# Altium PCB Bop_it PCB.PcbDoc
Units mil, origin at the board's own origin, x right, y up, seen from the top; angles counter-clockwise.
Board outline 2785 x 2940 mil, 2 copper layers (Top Layer, Bottom Layer); 23 components, 19 nets, 87 pads, 2 vias.
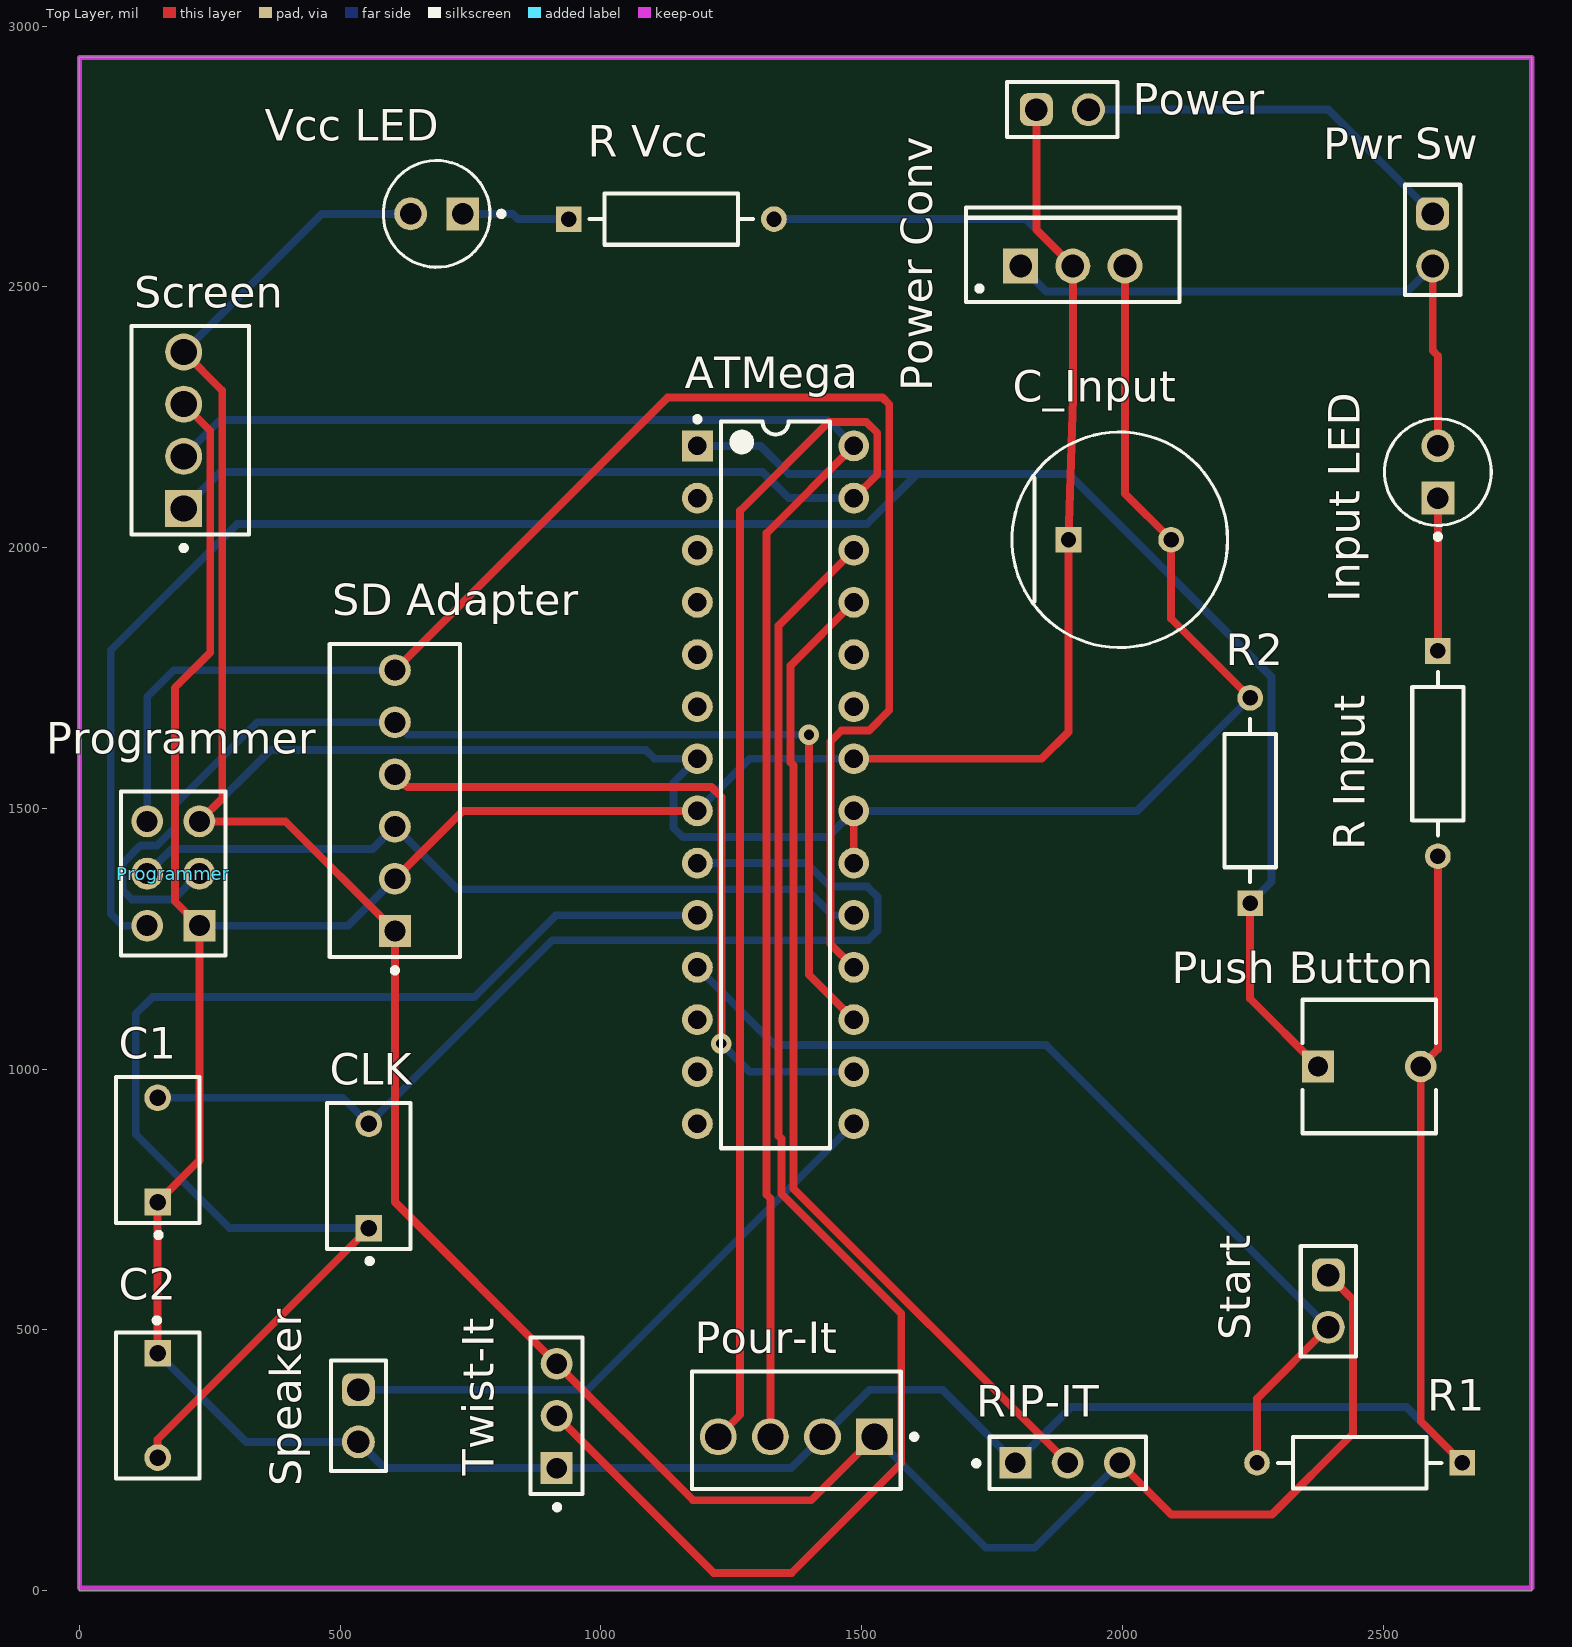
[diagram p0: Top Layer view]
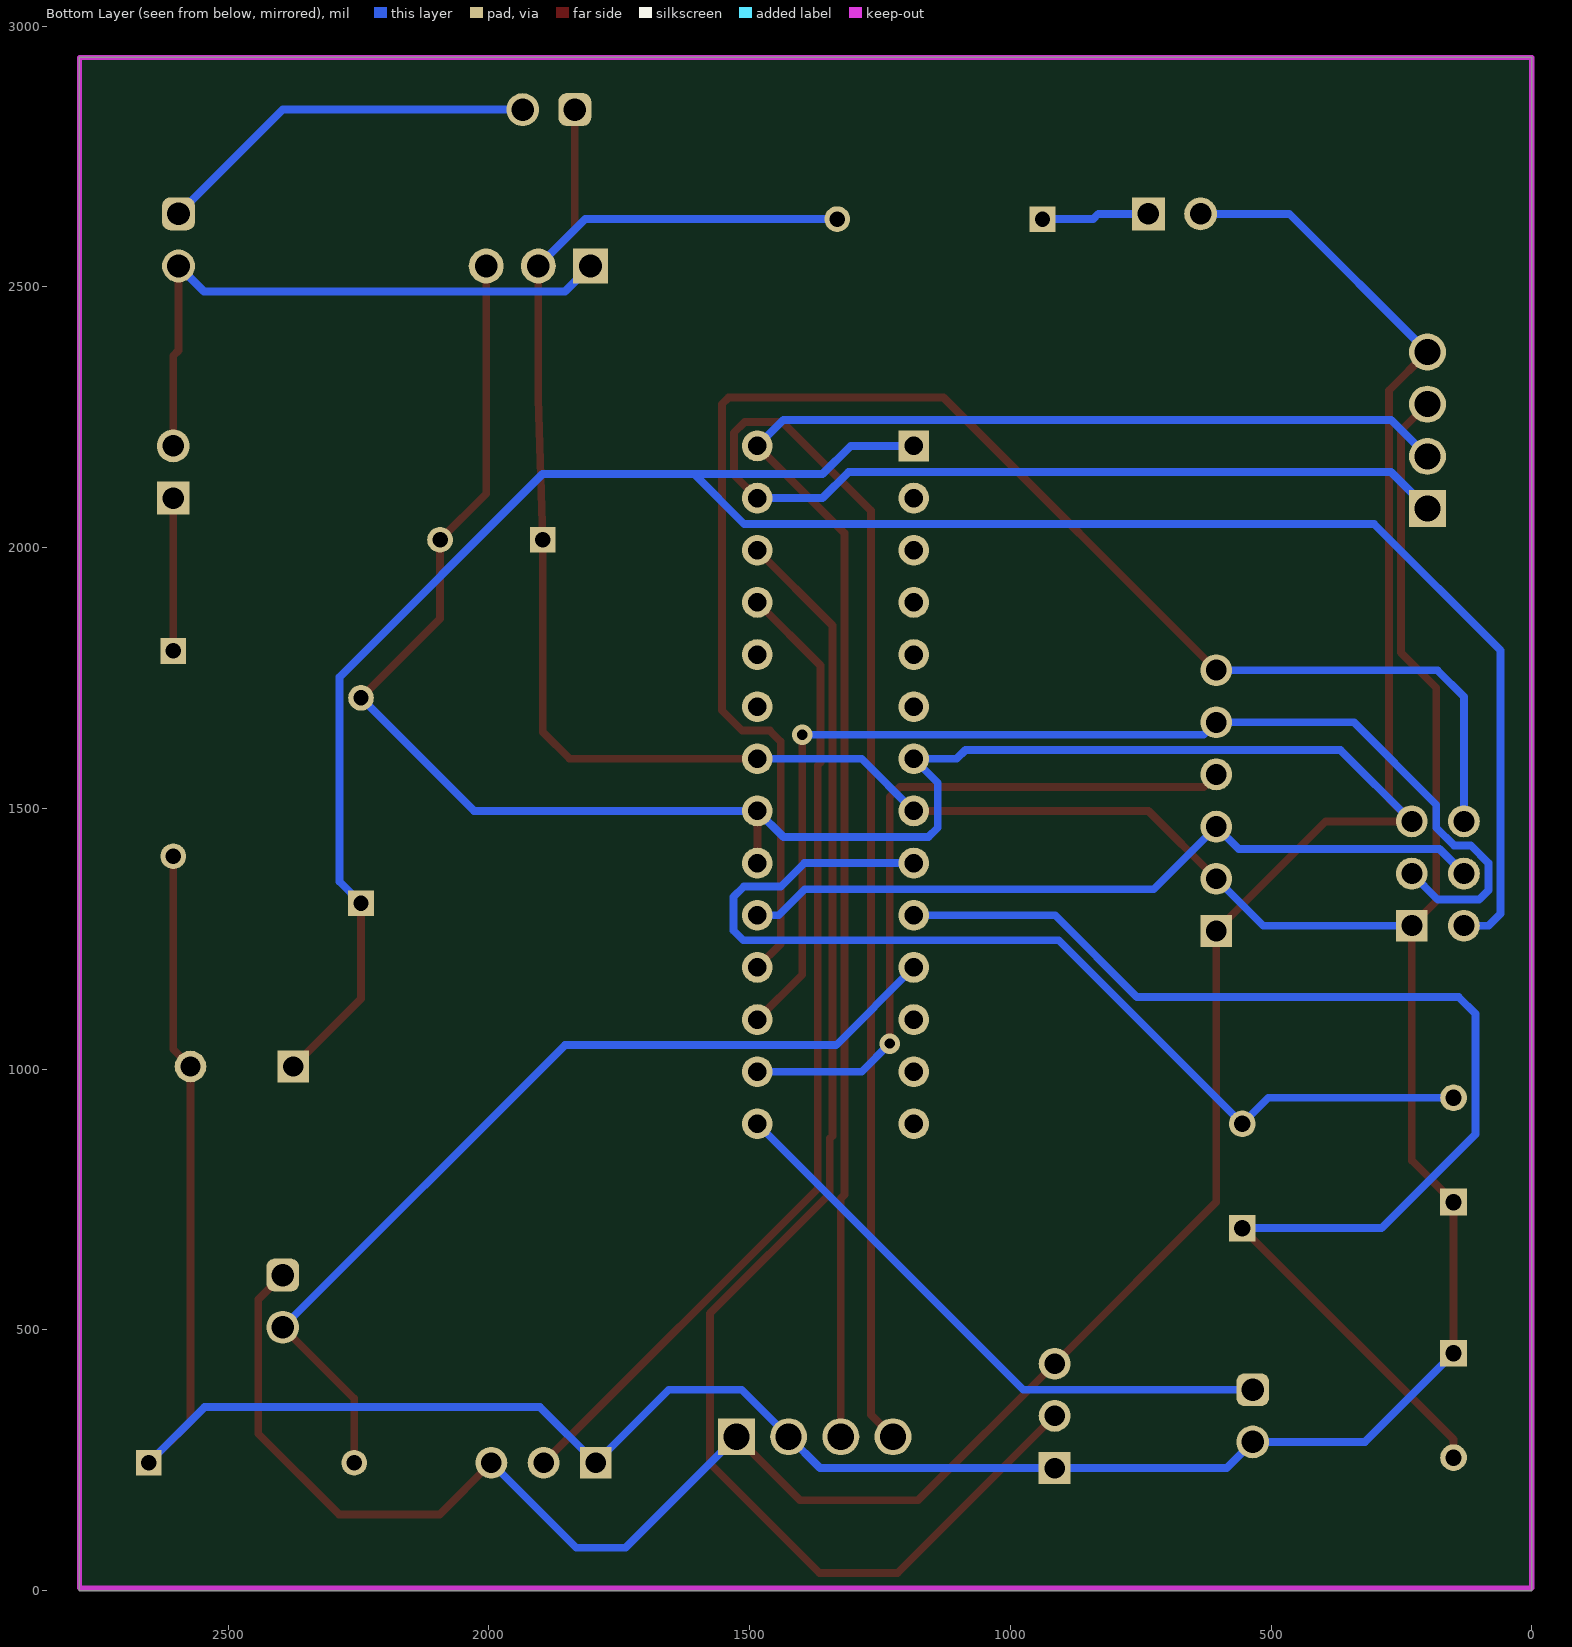
[diagram p1: Bottom Layer view, seen from below]
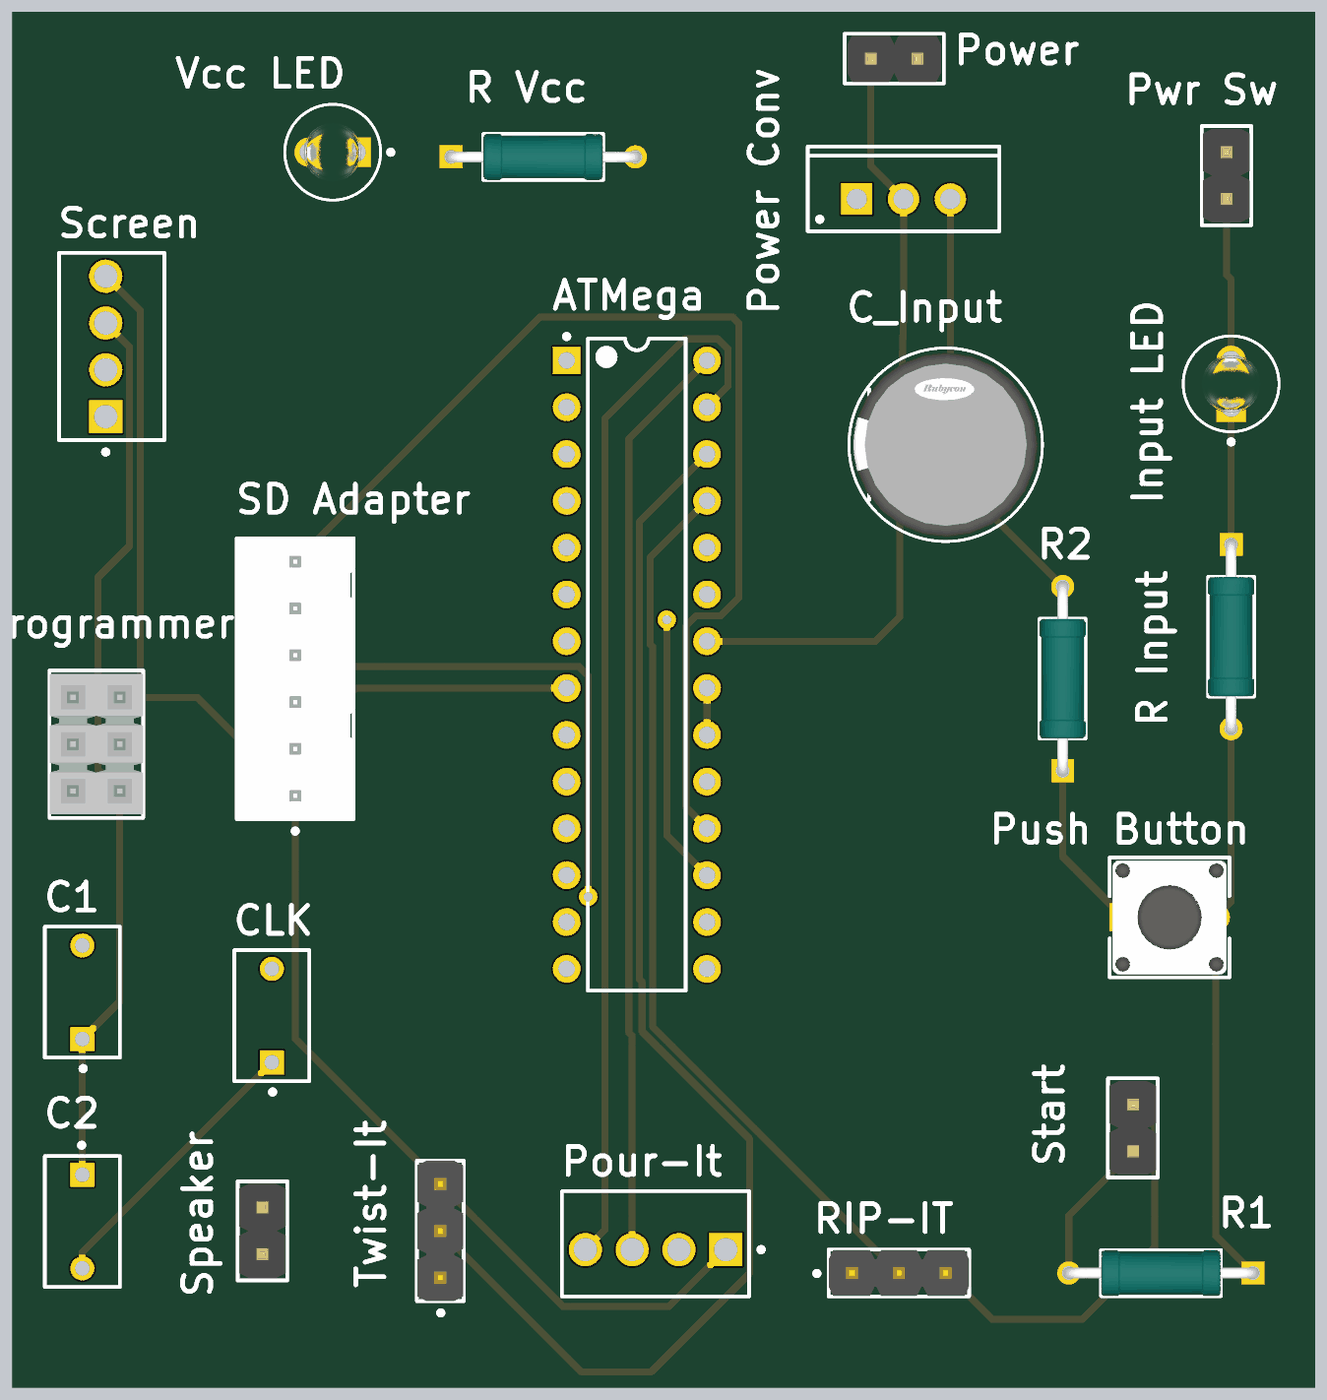
[diagram p2: 3D render of the assembled board from above, using the file's embedded part models]

## Layer stack, top to bottom
Top Solder: solder mask 0.4, Solder Resist, Dk 3.5
Top Layer: signal copper 1.4
Dielectric 1: dielectric 12.6, FR-4, Dk 4.8
Bottom Layer: signal copper 1.4
Bottom Solder: solder mask 0.4, Solder Resist, Dk 3.5

## Board outline
0,0 2785,0 2785,2940 0,2940

## Design rules (kind name [scope] priority, off if disabled: settings)
BoardOutlineClearance [All] p1: gap=7.87 ignorepadtopadclearanceinfootprint=FALSE except(15.75: Arc-SplitBarrior Arc-SplitContinuation Track-SplitBarrior Track-SplitContinuation SMDPad-SplitBarrior SMDPad-SplitContinuation THPad-SplitBarrior THPad-SplitContinuation Via-SplitBarrior Via-SplitContinuation Fill-SplitBarrior Fill-SplitContinuation Poly-SplitBarrior Poly-SplitContinuation Region-SplitBarrior Region-SplitContinuation Text-SplitBarrior Text-SplitContinuation)
Clearance "Clearance Bottom Layer" [OnLayer('Bottom Layer')] p1: gap=8 ignorepadtopadclearanceinfootprint=TRUE except(10: Arc-Text Track-Text SMDPad-Text THPad-Text Via-Text Fill-Text Poly-Text Region-Text Text-Text)
Clearance "Clearance Top Layer" [OnLayer('Top Layer')] p2: gap=8 ignorepadtopadclearanceinfootprint=TRUE except(10: Arc-Text Track-Text SMDPad-Text THPad-Text Via-Text Fill-Text Poly-Text Region-Text Text-Text)
Clearance [All] p3: gap=7.87 ignorepadtopadclearanceinfootprint=FALSE except(3.5: Arc-Arc Arc-Track Arc-SMDPad Track-Track Track-SMDPad SMDPad-SMDPad; 5: Arc-Via Track-Via SMDPad-Via THPad-Via Via-Via; 10: Arc-Text Track-Text SMDPad-Text THPad-Text Via-Text Fill-Text Poly-Text Region-Text Text-Text)
HoleSize [All] p1: absolutevalues=TRUE maxlimit=248.03 minlimit=7.87 maxpercent=80.000 minpercent=20.000
MinimumAnnularRing [All] p1: minimumring=3
MinimumSolderMaskSliver [All] p1: minsoldermaskwidth=3.94
PolygonConnect PolygonConnect_1 [All] p1: thpad.connectstyle=Relief thpad.reliefconductorwidth=20 thpad.reliefentries=4 thpad.polygonreliefangle="90 Angle" thpad.airgapwidth=10 smdpad.connectstyle=Relief smdpad.reliefconductorwidth=20 smdpad.reliefentries=4 smdpad.polygonreliefangle="90 Angle" smdpad.airgapwidth=10 via.connectstyle=Direct via.reliefconductorwidth=20 via.reliefentries=4 via.polygonreliefangle="90 Angle" via.airgapwidth=10
RoutingCorners [All] p1: cornerstyle=Round minsetback=100 maxsetback=100
RoutingVias [All] p1: holewidth=19.68 width=39.37 viastyle="Through Hole" minholewidth=7.87 minwidth=17.72 maxholewidth=39.37 maxwidth=78.74
SilkToSilkClearance [All] p1: silktosilkclearance=3.94
SilkToSolderMaskClearance [IsPad] p1: minsilkscreentomaskgap=3.94 clearancetoexposedcopper=TRUE
SolderMaskExpansion [All] p1: expansion=4 istentingtop=FALSE
Width [All] p1: maxlimit=100 minlimit=3.5 preferedwidth=15
25 further rules are at their usual default settings.

## Components (designator, comment, footprint, x,y, rotation, side; value= is the part's Value field where it differs from the comment)
ATMega "ATmega328-PU" 28P3 1335,1545 r0 top
C1 "C330C105M5U5TA" KEMT-C330C105M5U5TA 150,845 r90 top
C2 "C330C105M5U5TA" KEMT-C330C105M5U5TA 150,355 r270 top
C_Input "25ZL680MEFC10X20" FP-ZL10X20-MFG 1995,2015 r0 top
CLK "C330C105M5U5TA" KEMT-C330C105M5U5TA 555,795 r90 top (schematic designator "Crystall Oscillator")
"Input LED" "" FP-6_544-5255_01-4-MFG 2605,2145 r90 top
Pour-It "IMU" TECO-640456-4 1375,295 r0 top
Power "61300211121" 61300211121 1885,2840 r0 top (schematic designator "Input Power")
"Power Conv" "L7805CV" TO220 1905,2540 r0 top
Programmer "TSW-103-08-G-D" SMTC-TSW-103-08-X-D 230,1275 r90 top
"Push Button" "RESET" FP-FSM4JRT-MFG 2473.5,1005 r0 top
"Pwr Sw" "61300211121" 61300211121 2595,2590 r270 top (schematic designator "Power Switch")
R1 "" FP-MRS25-MFG 2455,245 r180 top
R2 "MRS25000C1000FRP00" FP-MRS25-MFG 2245,1515 r90 top
"R Input" "MRS25000C1000FRP00" FP-MRS25-MFG 2605,1605 r270 top
"R Vcc" "MRS25000C1000FRP00" FP-MRS25-MFG 1135,2630 r0 top
RIP-IT "Slide Pot" FP-90120-0763-MFG 1895,245 r0 top
Screen "640456-4" TECO-640456-4 200,2225 r270 top
"SD Adapter" "22-23-2061" MOLX-22-23-2061_V 605,1515 r90 top
Speaker "61300211121" 61300211121 535,335 r270 top
Start "61300211121" 61300211121 2395,555 r270 top (schematic designator "Start Button")
Twist-It "Rot Pot" FP-90120-0763-MFG 915,335 r90 top
"Vcc LED" "TLLG4401" FP-6_544-5255_01-4-MFG 685,2640 r180 top

## Footprints (in the part's own frame and the unit in brackets; to place one, negate y for a bottom-side part, rotate by r counter-clockwise, add the part's x,y. Pads: shape width x height; smd on the part's side, far side on the other; paste and mask are expansions set on the pad)
28P3 [mm] "28-Pin Plastic Dual In-Line Package (PDIP)"
  rect 1.5x1.5 hole 0.9: 1(-3.81,16.51)
  round 1.5 hole 0.9: 2(-3.81,13.97) 3(-3.81,11.43) 4(-3.81,8.89) 5(-3.81,6.35) 6(-3.81,3.81) 7(-3.81,1.27) 8(-3.81,-1.27) 9(-3.81,-3.81) 10(-3.81,-6.35) 11(-3.81,-8.89) 12(-3.81,-11.43) 13(-3.81,-13.97) 14(-3.81,-16.51) 15(3.81,-16.51) 16(3.81,-13.97) 17(3.81,-11.43) 18(3.81,-8.89) 19(3.81,-6.35) 20(3.81,-3.81) 21(3.81,-1.27) 22(3.81,1.27) 23(3.81,3.81) 24(3.81,6.35) 25(3.81,8.89) 26(3.81,11.43) 27(3.81,13.97) 28(3.81,16.51)
  silkscreen extent -3.93,-17.7 2.65,17.93, body extent -3.6,-17.65 3.6,17.65, height 4.58
61300211121 [mm] "Pin Header, pitch 2.54 mm, THT, Vertical, single row, 2p"
  rrect50% 1.6x1.6 hole 1.1: 1(-1.27,0)
  round 1.6 hole 1.1: 2(1.27,0)
  silkscreen extent -2.69,-1.34 2.69,1.34, body extent -2.54,-1.27 2.54,1.27, height 8.57
FP-6_544-5255_01-4-MFG [mm]
  rect 1.6x1.6 hole 1.05 paste-1000 mask+0: 1(-1.27,0)
  round 1.6 hole 1.05 paste-1000 mask+0: 2(1.27,0)
  silkscreen extent -3.27,-2.6 2.6,2.6, body extent -2.32,-2.32 2.32,2.32, height 0.25
FP-90120-0763-MFG [mm]
  rect 1.55x1.55 hole 1 paste-1000 mask+0: 1(-2.54,0)
  round 1.55 hole 1 paste-1000 mask+0: 2(0,0) 3(2.54,0)
  silkscreen extent -4.57,-1.27 3.81,1.27, body extent -3.91,-1.37 3.91,1.37, height 0.25
FP-FSM4JRT-MFG [mil]
  rect 60.65x60.65 hole 39 paste-39370.1 mask+0: 1(-98.5,0)
  round 60.65 hole 39 paste-39370.1 mask+0: 2(98.5,0)
  silkscreen extent -128,-128 128,128, body extent -133,-132 133,132, height 10
FP-MRS25-MFG [mm]
  rect 1.25x1.25 hole 0.75 paste-1000 mask+0: 1(-5,0)
  round 1.25 hole 0.75 paste-1000 mask+0: 2(5,0)
  silkscreen extent -3.97,-1.25 3.97,1.25, body extent -5.72,-1.35 5.72,1.35, height 0.25
FP-ZL10X20-MFG [mm]
  rect 1.25x1.25 hole 0.75 paste-1000 mask+0: 1(-2.5,0)
  round 1.25 hole 0.75 paste-1000 mask+0: 2(2.5,0)
  silkscreen extent -5.25,-5.25 5.25,5.25, body extent -5.35,-5.35 5.35,5.35, height 0.25
KEMT-C330C105M5U5TA [mm] "THD, 2-Leads, Body 7.11x4.07mm"
  rect 1.3x1.3 hole 0.8: 1(-2.54,0)
  round 1.3 hole 0.8: 2(2.54,0)
  silkscreen extent -4.27,-2.03 3.55,2.03, body extent -3.55,-2.03 3.55,2.03, height 9.14
MOLX-22-23-2061_V [mm] "THD, 6-Leads, Body 15.24x6.35mm, Pitch 2.54mm"
  rect 1.55x1.55 hole 1.02: 1(-6.35,0)
  round 1.55 hole 1.02: 2(-3.81,0) 3(-1.27,0) 4(1.27,0) 5(3.81,0) 6(6.35,0)
  silkscreen extent -8.39,-3.18 7.62,3.18, body extent -7.54,-3.25 7.54,3.1, height 10.67
SMTC-TSW-103-08-X-D [mm] ".025 SQ Post Terminal Strip Assembly, 2x3 Pins, Vertical, 2.54mm Pitch, Male"
  rect 1.55x1.55 hole 1.02: 1(0,0)
  round 1.55 hole 1.02: 2(0,2.54) 3(2.54,0) 4(2.54,2.54) 5(5.08,0) 6(5.08,2.54)
  silkscreen extent -1.46,-1.27 6.54,3.81, body extent -1.27,-1.27 6.35,3.81, height 8.38
TECO-640456-4 [mm] "Through Hole, 4-Leads, Body 10.16x5.72mm, Pitch 2.54mm"
  rect 1.8x1.8 hole 1.27 paste+0: 1(3.81,0)
  round 1.8 hole 1.27 paste+0: 2(1.27,0) 3(-1.27,0) 4(-3.81,0)
  silkscreen extent -5.08,-2.54 5.86,3.18, body extent -5.08,-2.54 5.08,3.18, height 10.03
TO220 [mm] "TO, Thru-Hole, Vertical, Heatsink Mounted; 3 In-Line Leads; Pitch 2.54 mm"
  rect 1.7x1.7 hole 1.1: 1(-2.54,0)
  round 1.7 hole 1.1: 2(0,0) 3(2.54,0)
  silkscreen extent -5.2,-1.75 5.2,2.85, body extent -5.25,-1.8 5.25,2.9, height 19.7

## Part data
ATMega: library part CMP-0095-00015-2, "8-bit AVR Microcontroller, 32KB Flash, 1KB EEPROM, 2KB SRAM, 28-pin PDIP, Industrial Grade (-40°C to 85°C)", ComponentLink1Description="Manufacturer URL", ComponentLink1URL=http://www.atmel.com/, ComponentLink2Description="ATmega48A/48PA/88A/88PA/168A/168PA/328/328P Datasheet", ComponentLink2URL=http://www.atmel.com/dyn/resources/prod_documents/8271.pdf, ComponentLink3Description="ATmega48A/48PA/88A/88PA/168A/168PA/328/328P Summary", ComponentLink3URL=http://www.atmel.com/dyn/resources/prod_documents/8271S.pdf, DatasheetVersion="revD, May-2011", PackageDescription="28-lead (0.300\"/7.62mm Wide) Plastic Dual Inline Package (PDIP)", PackageReference=28P3, PackageVersion="revB, Sep-2001", RevisionNote="DatasheetVersion updated. URLs added."
C1 C2 CLK: library part CMP-2000-06056-1, "Ceramic Capacitor, 1 uF, +/- 20%, 50 V, -10 to 85 degC, 2-Pin THD, RoHS, Bulk", Capacitance=1µF, Manufacturer=Kemet, Operating Temperature=10°C~85°C, Package / Case=Radial, Package Description="2-Pin Through Hole Device, Body 7.11 x 4.07 mm", Ratings=-, Standard Package=250, Temperature Coefficient=Z5U, Tolerance=±20%, Voltage - Rated=50V, Applications=GeneralPurpose, Catalog Drawings=C330(std), Category=Capacitors, Datasheet URL=http://www.kemet.com/Lists/ProductCatalog/Attachments/599/KEM_C1051_GOLDMAX_Z5U.pdf, Datasheet Version=12/2015, Family=CeramicCapacitors, Features=-, Height - Seated (Max)="0.360\"(9.14mm)", Lead Spacing="0.200\"(5.08mm)", Lead Style=Straight, Manufacturer URL=http://www.kemet.com/, Mounting Technology=ThroughHole, Mounting Type=ThroughHole, Online Catalog=GoldenMax™Series, Other Names=399-4390, Package Reference=C330C105M5U5TA, Packaging=Bulk, PCN Design/Specification=C3yySeriesGoldenMaxLeadConfiguration02/Feb/2015, Product Training Modules=CapacitorBasics-TypicalUsesforCapacitors, Series=GoldenMax™, Size / Dimension="0.300\"Lx0.150\"W(7.62mmx3.81mm)", Thickness (Max)=-
C_Input: library part CMP-35376-000011-1, "CAP ALUM 680UF 20% 25V RADIAL", Capacitance=680uF, Case/Package=Radial, Dielectric Material=Aluminium, Leakage Current=3uA, Max Operating Temperature=105°C, Min Operating Temperature=-40°C, Package Quantity=1000, Ripple Current=1.82A, Tolerance=20%, Voltage=25V, Construction=RADIAL, Diameter=10mm, Height=20mm, Height - Seated (Max)=0.866inch, Impedance=23mR, Lead Diameter=0.6mm, Lead Pitch=5mm, Life (Hours)=4000Hour, Mount="Through Hole", Packaging=Bulk, Radiation Hardening=No, RoHS Compliant=Yes, Series=ZL, Termination=Radial, Voltage Rating=25V
"Input LED" "Vcc LED": library part CMP-00030-39390728-1, "TLLG4401 LED, Green, 2mcd, 3mmDia., T-1, +/-25deg, 565nm, 7mA, 1.9V Vf, 20V Vr, 20mW, -40", Ambient Temperature Range High=100°C, Case/Package=Radial, Color=Green, Forward Current=2mA, Forward Voltage=1.9V, Min Operating Temperature=-40°C, Power Dissipation=20mW, Reverse Voltage=6V, Voltage Rating (DC)=2.4V, Depth=3.2mm, Dominant Wavelength=575nm, Height=4.5mm, Illumination Color=Green, Lead Free="Lead Free", Lead Length=23mm, Length=3.2mm, Lens Color=Green, Lens Style="Circular, Colored, Diffused, Dome, Round, Tinted", Lens Transparency=Diffused, Luminous Intensity=2mcd, Max Junction Temperature (Tj)=100°C, Max Operating Temperature=100°C, Mount="Through Hole", NexarPartId=39390728, Number of Elements=1, Number of LEDs=1, Number of Pins=2, Packaging=Bulk, Peak Wavelength=565nm, Radiation Hardening=No, REACH SVHC=Unknown, RoHS=Compliant, Schedule B="8541402000, 8541402000", Test Current=2mA, Viewing Angle=25°, Wavelength=575nm
Pour-It Screen: library part CMP-2000-05419-1, "Male Header, Pitch 2.54 mm, 1 x 4 Position, Height 10.03 mm, Tail Length 3.56 mm, RoHS, Bulk", Color=White, Current, Rating="5 /  / A", Flammability Rating=UL94V-0, Manufacturer="TE Connectivity", Temperature, Operating="-55to+105 /  / degC", Voltage, Rating="250 /  / V", Agency Approvals=CSA,UL, Angle=Straight, Brand/Series=MTA-100Series, Color, Housing=White, Connector Type=MTA-100, Contact Centerline Spacing="0.100 /  / in.", Contact Mating Area Plating=Tin, Contact Plating=Tin, Contact Shape=Square, Contact Termination Area Plating=Tin, Datasheet URL=https://datasheet.ciiva.com/16286/eng-ds-82056-mta-0608-16286228.pdf, Datasheet Version=Dec-14, Length, Overall="0.4 /  / \"", Length, Pin="0.14 /  / \"", Length, Terminal Post="0.14 /  / in.", Manufacturer URL=http://www.te.com/, Material, Contact=CopperAlloy, Material, Housing=Polyester, Mount Angle=Vertical, Mounting Hole Size="0.04 /  / \"", Mounting Type=PCMount, Number of Contacts=4, Number of Positions=4, Number of Rows=1, Pin Spacing="0.1 /  / \"", Primary Type=InterconnectSystem, Size, Post="0.025 /  / in.", Special Features=Pinstrip, Standards=RoHSCompliant,ELVCompliant,UL94V-0, Termination=Solder, Type=PCBPlug
Power "Pwr Sw" Speaker Start: library part CMP-1712-00002-5, Color=Black, Contact Resistance=20mΩ, Current Rating=3A, Max Operating Temperature=125°C, Min Operating Temperature=-40°C, Operating Supply Voltage=250V, Connector Type="Male Pin", Contact Gender=Male, Contact Material=Copper, Contact Mating Length=5.9944mm, Contact Plating=Gold, Gender=Male, Height=8.94mm, Housing Material=PBT, Lead Free="Lead Free", Lead Pitch=2.54mm, Mount="Through Hole", NexarPartId=20081794, Number of Contacts=2, Number of Pins=2, Number of Positions=2, Number of Rows=1, Orientation=Vertical, Packaging=Bulk, Pitch=2.54mm, REACH SVHC="No SVHC", RoHS=Compliant, Termination="Through Hole", Voltage Rating=250V
"Power Conv": library part CMP-0244-00483-1, "Positive Voltage Regulator, 5V, 3-Pin TO-220", ComponentLink1Description="Manufacturer URL", ComponentLink1URL=http://www.st.com, ComponentLink2Description=Datasheet, ComponentLink2URL=http://www.st.com/internet/com/TECHNICAL_RESOURCES/TECHNICAL_LITERATURE/DATASHEET/CD00000444.pdf, ComponentLink3Description="Package Specification", ComponentLink3URL=http://www.st.com/internet/com/TECHNICAL_RESOURCES/TECHNICAL_LITERATURE/PACKAGE_INFORMATION/CD00004649.pdf, DatasheetVersion=16/11/2011, PackageDescription="TO, Thru-Hole, Vertical, Heatsink Mounted; 3 In-Line Leads; Pitch 2.54 mm", PackageReference=TO220, PackageVersion=ver3.0
Programmer: library part CMP-1024-00338-1, "0.025\" SQ Post Header, Through-hole, Vertical, -55 to 125 degC, 2.54 mm Pitch, 6-Pin, Male, RoHS", Manufacturer=Samtec, Temperature Range="-55 to 125 degC", ComponentLink1Description="Manufacturer URL", ComponentLink1URL=http://www.samtec.com, ComponentLink2Description=Datasheet, ComponentLink2URL=http://www.samtec.com/documents/webfiles/pdf/TSW_TH.PDF, ComponentLink3Description="Package Specification", ComponentLink3URL=http://www.samtec.com/documents/webfiles/cpdf/TSW-XXX-XX-XXX-X-XX-XXX-MKT.pdf, DatasheetVersion=F-214, Mounting Technology=Through-hole, Orientation=Vertical, PackageDescription=".025[0.64] SQ. Post Terminal Strip Assembly", PackageReference=TSW-103-08-X-D, PackageVersion="DM, 8/1988", PartNumber=TSW-103-08-G-D, Pitch="2.54 mm", RoHS=True
"Push Button": library part CMP-03407-000038-1, "SWITCH TACTILE SPST-NO 0.05A 24V", Case/Package=Radial, Contact Current Rating=50mA, Contact Resistance=100mR, Max Operating Temperature=105°C, Max Voltage Rating (DC)=12V, Min Operating Temperature=-35°C, Operating Force=1.57N, Package Quantity=10000, Actuator Diameter=3.5mm, Actuator Length=0.055inch, Actuator Material=Resin, Actuator Type=Standard, Contact Material="Copper Alloy", Contact Plating=Silver, Current Rating=50mA, Depth=6.19mm, Electrical Life=100000Cycles, Illumination Type=Non-Illuminated, Length=6.19mm, Max Current Rating=50mA, Mechanical Life=100000Cycles, Mount="Through Hole", Orientation=Straight, Packaging="Tape and Reel", Radiation Hardening=No, RoHS Compliant=Yes, Series=FSMJRT, Switch Function=Off-Mom, Switch Travel=0.25mm, Termination="PC Pins", Throw Configuration=SPST, Type=Switch, Voltage Rating (DC)=12V
R1 R2 "R Input" "R Vcc": library part CMP-00030-42757237-1, "MRS25000C1000FRP00 Resistor, 100 Ohm, ± 1%, 600 mW, Axial Leaded, Metal Film (Thin Film), Professional", Case/Package=Axial, Max Operating Temperature=155°C, Max Power Dissipation=600mW, Min Operating Temperature=-55°C, Resistance=100Ω, Temperature Coefficient=50ppm/°C, Tolerance=1%, Voltage Rating=350V, Composition="Metal Film, Thin Film", Contact Plating=Tin, Diameter=2.5mm, Lead Diameter=600µm, Lead Free="Lead Free", Length=6.5mm, Military Standard=Not, Mount="Through Hole", NexarPartId=42757237, Number of Pins=2, Number of Terminations=2, Packaging="Tape & Reel (TR)", Power Rating=600mW, Radiation Hardening=No, REACH SVHC=Unknown, RoHS=Compliant, Schedule B="8533210090, 8533210090", Termination=Axial, Voltage Rating (DC)=350V, Width=2.5mm
RIP-IT Twist-It: library part CMP-04776-000084-1, "CONN HEADER VERT 3POS 2.54MM", Current Rating=3A, Manufacturer=Molex, Manufacturer Part Number=90120-0763, Temperature="-55°C to +125°C", Temperature Range High=+125°C, Temperature Range Low=-55°C, Voltage Rating=350V, Automotive=No, Category=Conn, ComponentLink2Description=Datasheet, ComponentLink2URL=https://www.molex.com/webdocs/datasheets/pdf/en-us/0901200763_PCB_HEADERS.pdf, Conn Gender=Male, Conn Orientation=Vertical, Contact Material=Gold,Nickel, Device Class L1=Connectors, Device Class L2="Headers and Wire Housings", Device Class L3=unset, Digikey Description="CONN HEADER VERT 3POS 2.54MM", Footprint Url=https://www.molex.com/pdm_docs/sd/901200763_sd.pdf, Height=5.8mm, Lead Free=Yes, Mouser Description="Board-To-Board Connector, C-Grid III 90120 Series, Through Hole, Header, 3, 2.54 mm", Number of Contacts=3, Number of Rows=1, Octopart=https://octopart.com/90120-0763-molex-655433, Package=90120-0763, Pitch=2.54mm, RoHS=TRUE
"SD Adapter": library part CMP-2000-05536-1, "Male Header, Pitch 2.54 mm, 1 x 6 Position, Height 10.67 mm, Tail Length 3.56 mm, 0 to 70 degC, RoHS, Bulk", Current Rating=4A, Manufacturer=Molex, Package Description="Male Header, Pitch 2.54 mm, 1 x 6 Position, Height 10.67 mm, Tail Length 3.56 mm", Voltage Rating=250V, Brand=Molex, Contact Material=Brass, Contact Plating=Tin, Datasheet URL=https://datasheet.ciiva.com/19460/232303-19460895.pdf, Datasheet Version="Rev. P, 09/2001", Factory Pack Quantity=1000, Housing Material=Nylon, Manufacturer URL=http://www.molex.com/, Mounting Angle=Vertical, Mounting Style=ThroughHole, Mounting Technology=ThroughHole, Number of Positions=6, Number of Positions / Contacts=6, Number of Rows=1, Package Reference=22-23-2061, Packaging=Bulk, Pitch=2.54mm, Product Category=.100K.K.Connectors, Product Type=Headers, RoHS=Details, Series=6373, Termination Style=ThroughHole, Tradename=KK, Type=PinStrip

## Via types
v1: diameter 39.37, hole 19.68, Top Layer to Bottom Layer, 2 vias

## Nets (pads, with @x,y where several pads share a name; then routed paths per layer and width w, separated by ;. In a path a pad name is that pad's centre, name@x,y a point inside that pad or via, vN(x,y) a via of type N, cw(c..) or ccw(c..) an arc to the next point about the centre after c; other vN are vias at no path point)
5V: "Power Conv.3" "SD Adapter.1" "Vcc LED.2" ATMega.7 ATMega.20 ATMega.21 C_Input.2 Pour-It.1 Programmer.5 R2.2 RIP-IT.3 Screen.4 Start.1 Twist-It.3 | length 8605.7
  Top Layer w15: Screen.4 274,2301 274,1519 Programmer.5 395,1475 605,1265 605,745 Twist-It.3 1176.8,173.2 1403.2,173.2 Pour-It.1 ; ATMega.20 ATMega.21 ; RIP-IT.3 2094,146 2287,146 2442,301 2442,558 Start.1 ; 2005,2540 2005,2103.43 C_Input.2 2093.43,1863.42 R2.2
  Bottom Layer w15: Screen.4 465,2640 635,2640 ; Programmer.5 367,1612 1086,1612 1103,1595 ATMega.7 1139,1549 1139,1463 1157,1445 1435,1445 ATMega.21 2028.15,1495 R2.2 ; Pour-It.1 1738,82 1832,82 RIP-IT.3
GND: "Power Conv.2" "Push Button.2" "R Input.2" "R Vcc.2" "SD Adapter.2" ATMega.8 ATMega.22 C1.1 C2.1 C_Input.1 Pour-It.2 Power.1 Programmer.1 R1.1 RIP-IT.1 Screen.3 Speaker.2 Twist-It.1 | length 9587
  Top Layer w15: C2.1 C1.1 230,825 Programmer.1 183,1322 183,1731 251,1799 251,2224 Screen.3 ; 605,1365 735,1495 ATMega.8 ; ATMega.22 1845,1595 1896.57,1646.57 C_Input.1 1905,2286.43 1905,2540 1835,2610 Power.1 ; 2605,1408.15 2605,1038 2572,1005 2572,324.85 R1.1
  Bottom Layer w15: C2.1 320,285 Speaker.2 585,235 Twist-It.1 1365,235 Pour-It.2 1515,385 1655,385 RIP-IT.1 1902,352 2544.85,352 R1.1 ; Programmer.1 515,1275 605,1365 ; ATMega.8 1285,1595 ATMega.22 ; 1331.85,2630 1815,2630 1905,2540
NetATMega_1: "Push Button.1" ATMega.1 Programmer.2 R2.1 | length 4372.9
  Top Layer w15: R2.1 2245,1135 2375,1005
  Bottom Layer w15: Programmer.2 83,1275 60,1298 60,1803 302,2045 1510,2045 1606,2141 ; ATMega.1 1306,2195 1360,2141 1606,2141 ; R2.1 2286,1359.15 2286,1752 1897,2141 1606,2141
NetATMega_9: ATMega.9 C1.2 CLK.2 | length 1992.3
  Bottom Layer w15: C1.2 505,945 CLK.2 907,1247 1512,1247 1531,1266 1531,1330 1511.03,1349.97 1440,1349.97 1394.97,1395 ATMega.9
NetATMega_10: ATMega.10 C2.2 CLK.1 | length 2515.6
  Top Layer w15: C2.2 150,290 CLK.1
  Bottom Layer w15: CLK.1 288,695 108,875 108,1106 140,1138 757,1138 914,1295 ATMega.10
NetATMega_11: ATMega.11 R1.2 Start.2 | length 1812.5
  Top Layer w15: R1.2 2258.15,368.15 Start.2
  Bottom Layer w15: ATMega.11 1334,1046 1854,1046 Start.2
NetATMega_15: ATMega.15 Speaker.1 | length 1161.2
  Bottom Layer w15: Speaker.1 975,385 ATMega.15
NetATMega_16: "SD Adapter.4" ATMega.16 | length 1393.2
  Top Layer w15: 605,1565 629,1541 1212,1541 1231,1522 v1(1231,1049)
  Bottom Layer w15: v1(1231,1049) 1285,995 ATMega.16
NetATMega_17: "SD Adapter.5" ATMega.17 Programmer.3 | length 2272.4
  Top Layer w15: v1(1399,1641) 1399,1181 ATMega.17
  Bottom Layer w15: Programmer.3 180,1325 101,1325 83,1343 83,1394.99 117,1428.99 149.06,1428.99 183,1462.93 183,1507 341,1665 605,1665 629,1641 v1(1399,1641)
NetATMega_18: "SD Adapter.6" ATMega.18 Programmer.6 | length 3081.7
  Top Layer w15: 605,1765 1128,2288 1540.06,2288 1553.03,2275.03 1553.03,1688.03 1514,1649 1461,1649 1439.97,1627.97 1439.97,1240.03 ATMega.18
  Bottom Layer w15: Programmer.6 130,1714 181,1765 605,1765
NetATMega_19: "SD Adapter.3" ATMega.19 Programmer.4 | length 1462.7
  Bottom Layer w15: Programmer.4 177,1422 562,1422 605,1465 725,1345 1393.97,1345 1443.97,1295 ATMega.19
NetATMega_25: ATMega.25 RIP-IT.2 | length 1920.2
  Top Layer w15: ATMega.25 1363.81,1773.81 1363.81,1588.18 1369.21,1582.79 1369.21,770.79 RIP-IT.2
NetATMega_26: ATMega.26 Twist-It.2 | length 2780.8
  Top Layer w15: Twist-It.2 1216,34 1366,34 1576,244 1576,531.21 1346.21,761 1346.21,866.61 1340.81,872 1340.81,1850.81 ATMega.26
NetATMega_27: ATMega.27 Pour-It.4 Screen.1 | length 3613.9
  Top Layer w15: Pour-It.4 1267,337 1267,2071 1437,2241 1509,2241 1530.03,2219.97 1530.03,2140.03 ATMega.27
  Bottom Layer w15: Screen.1 270,2145 1310,2145 1360,2095 ATMega.27
NetATMega_28: ATMega.28 Pour-It.3 Screen.2 | length 3306.9
  Top Layer w15: Pour-It.3 1325,752 1317.81,759.19 1317.81,2027.81 ATMega.28
  Bottom Layer w15: Screen.2 270,2245 1435,2245 ATMega.28
"NetInput LED_1": "Input LED.1" "R Input.1" | length 293.2
  Top Layer w15: 2605,1801.85 2605,2095
"NetInput LED_2": "Input LED.2" "Power Conv.1" "Pwr Sw.2" | length 1179.7
  Top Layer w15: 2595,2540 2595,2378 2605,2368 2605,2195
  Bottom Layer w15: 1805,2540 1854,2491 2546,2491 2595,2540
"NetR Vcc_1": "R Vcc.1" "Vcc LED.1" | length 207.3
  Bottom Layer w15: 735,2640 831,2640 841,2630 938.15,2630
VCC: "Pwr Sw.1" Power.2 | length 742.8
  Bottom Layer w15: Power.2 2395,2840 2595,2640
pads on no net: ATMega.2 ATMega.3 ATMega.4 ATMega.5 ATMega.6 ATMega.12 ATMega.13 ATMega.14 ATMega.23 ATMega.24

## Keep-outs
Keep-Out Layer:
  lines w10: 2785,1390 2785,1370 ; 0,5 25,5 2785,5 2785,1370 ; 0,5 0,5 ; 0,5 0,30 0,2050 0,2920 0,2940 2600,2940 2785,2940 2785,1370